# Altium PCB PCB1.PcbDoc
Units mil, origin at the board's own origin, x right, y up, seen from the top; angles counter-clockwise.
Board outline 900 x 4570 mil, 2 copper layers (Top Layer, Bottom Layer); 27 components, 20 nets, 79 pads, 8 vias.
Unrouted connection lines stored in the file: 1.
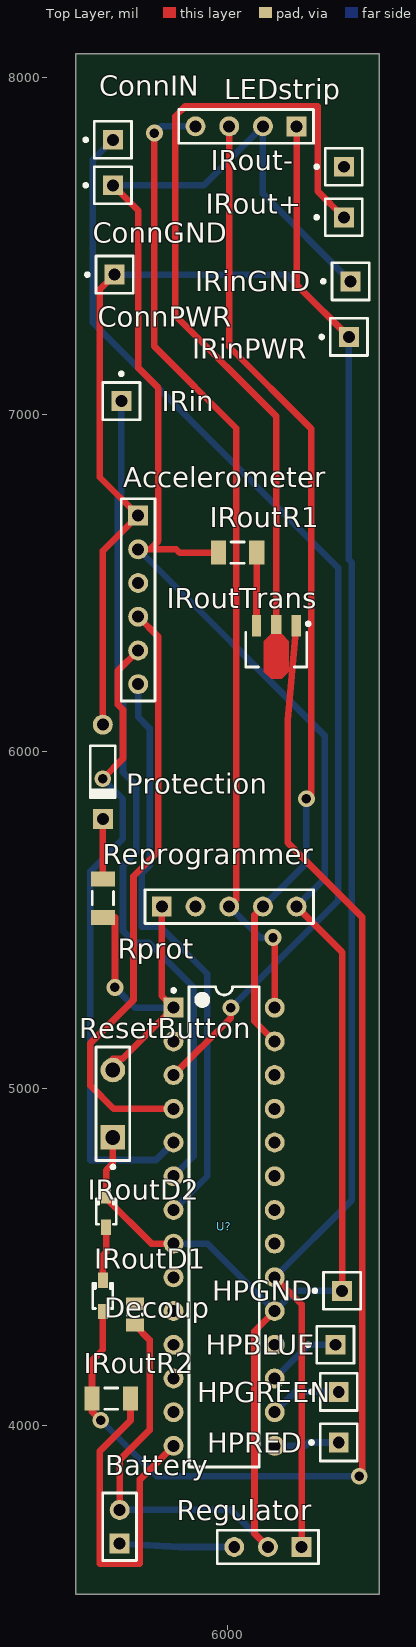
[diagram p0: Top Layer view]
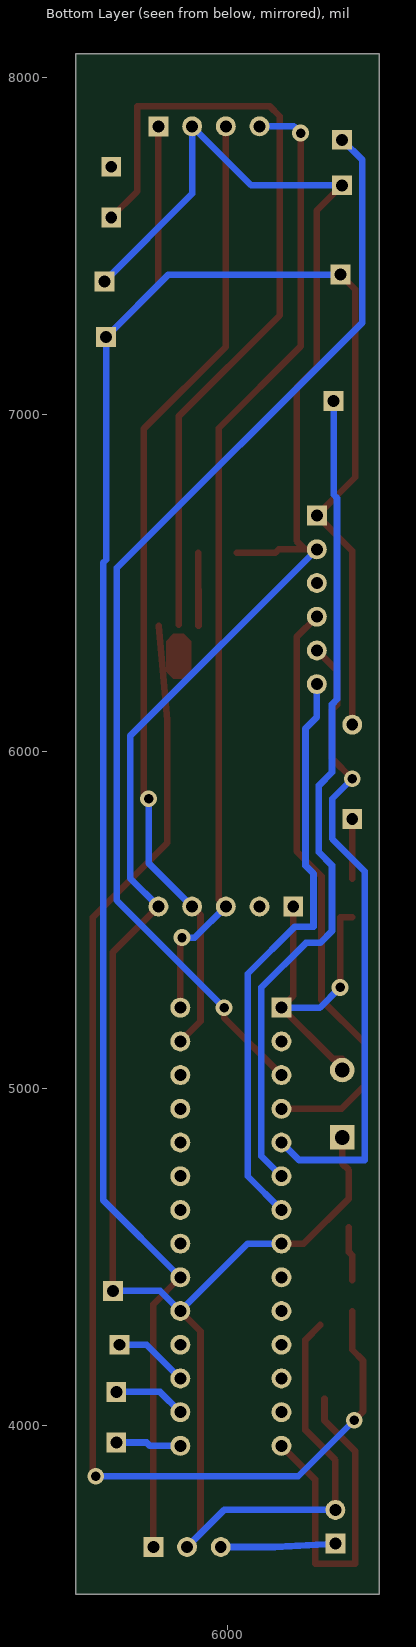
[diagram p1: Bottom Layer view, seen from below]

## Layer stack, top to bottom
Top Solder: solder mask 0.4, Solder Resist, Dk 3.5
Top Layer: signal copper 1.4
Dielectric 1: dielectric 12.6, FR-4, Dk 4.8
Bottom Layer: signal copper 1.4
Bottom Solder: solder mask 0.4, Solder Resist, Dk 3.5

## Board outline
5550,3500 6450,3500 6450,8070 5550,8070

## Design rules (kind name [scope] priority, off if disabled: settings)
Clearance [All] p1: gap=20
PolygonConnect [All] p1: connectstyle=Relief reliefconductorwidth=10 reliefentries=4 polygonreliefangle="90 Angle" airgapwidth=10
RoomDefinition Schematic [InComponentClass('Schematic')] p1: confinementstyle=ConfineIn formatcopy=TRUE lockcomponents=FALSE outline 4475,935 17370,935 17370,1785 4475,1785
RoutingVias [All] p1: holewidth=28 width=50 viastyle="Through Hole" minholewidth=28 minwidth=50 maxholewidth=28 maxwidth=50
SolderMaskExpansion [All] p1: expansion=4
Width [All] p1: maxlimit=19.68 minlimit=19.68 preferedwidth=19.68 minimp=50.000000 maximp=50.000000 favimp=50.000000
30 further rules are at their usual default settings.

## Components (designator, comment, footprint, x,y, rotation, side; value= is the part's Value field where it differs from the comment)
Accelerometer "Header 6" HDR1X6 5735,6700 r270 top
Battery "Header 2" HDR1X2 5680,3650 r90 top
ConnGND "Plug" PIN1 5660,7680 r90 top
ConnIN "Plug" PIN1 5660,7815 r90 top
ConnPWR "Plug" PIN1 5665,7415 r90 top
Decoup "10uf" CAPC0805(2012)75_L 5725,4330 r90 top (schematic designator DecouplingCap)
HPBLUE "Plug" PIN1 6320,4240 r90 top
HPGND "Plug" PIN1 6340,4400 r90 top
HPGREEN "Plug" PIN1 6330,4100 r90 top
HPRED "Plug" PIN1 6330,3950 r90 top
IRin "Plug" PIN1 5685,7040 r0 top
IRinGND "Plug" PIN1 6365,7395 r90 top
IRinPWR "Plug" PIN1 6360,7230 r90 top
IRout+ "Plug" PIN1 6345,7585 r90 top
IRout- "Plug" PIN1 6345,7735 r90 top
IRoutD1 "ZHCS400" DIOD-SOD323-2_V 5630,4385 r90 top
IRoutD2 "ZHCS400" DIOD-SOD323-2_V 5640,4635 r90 top
IRoutR1 "1K 5% 1206(3216)" RESC1206(3216)_N 6030,6590 r0 top
IRoutR2 "7.2K 5% 1206(3216)" RESC1206(3216)_N 5655,4080 r0 top
IRoutTrans "BFN18" INF-SOT89_SC-62_M 6145,6310 r270 top
LEDstrip "Header 4" HDR1X4 6205,7855 r180 top
Protection "Diode 1N4148" DO-35 5630,5940 r270 top
Regulator "Header 3" HDR1X3 6220,3640 r180 top
Reprogrammer "Header 5" HDR1X5 5805,5540 r0 top
ResetButton "SW-SPST" SPST-2 5660,4955 r90 top
Rprot "1K 5% 1206(3216)" RESC1206(3216)_N 5630,5565 r90 top
U? "PIC16F72-I/SP" SPDIP300-SP28 5990,4590 r0 top

## Footprints (in the part's own frame and the unit in brackets; to place one, negate y for a bottom-side part, rotate by r counter-clockwise, add the part's x,y. Pads: shape width x height; smd on the part's side, far side on the other; paste and mask are expansions set on the pad)
CAPC0805(2012)75_L [mm] "Chip Capacitor, Body 2.0x1.2mm, Height 0.75mm, IPC High Density"
  rect 0.95x1.35 smd: 1(-0.8,0) 2(0.8,0)
  silkscreen extent -0.05,-0.58 0.05,0.58, body extent -1.1,-0.72 1.1,0.72, height 0.75
DIOD-SOD323-2_V [mil] "SMT Diode, 2 Leads, Body 1.7 x 1.3 mm"
  rect 45x30 smd: 1(-46.26,0) 2(46.26,0)
  silkscreen extent -37,-30 37,30, body extent -39,-27 38,28, height 43
DO-35 [mm] "Diode, Axial; Body 3.8 x 1.9 mm (LxDia. max), Lead Dia. 0.53 mm (max)"
  round 1.5 hole 0.9: 1(-3.55,0)
  rect 1.5x1.5 hole 0.9: 2(3.55,0)
  silkscreen extent -1.95,-0.95 2.05,0.95
HDR1X2 [mm] "Connector; Header; 2 Position"
  rect 1.5x1.5 hole 0.9: 1(0,0)
  round 1.5 hole 0.9: 2(2.54,0)
  silkscreen extent -1.27,-1.27 3.81,1.27
HDR1X3 [mm] "Connector; Header; 3 Position"
  rect 1.5x1.5 hole 0.9: 1(0,0)
  round 1.5 hole 0.9: 2(2.54,0) 3(5.08,0)
  silkscreen extent -1.27,-1.27 6.35,1.27
HDR1X4 [mm] "Connector; Header; 4 Position"
  rect 1.5x1.5 hole 0.9: 1(0,0)
  round 1.5 hole 0.9: 2(2.54,0) 3(5.08,0) 4(7.62,0)
  silkscreen extent -1.27,-1.27 8.89,1.27
HDR1X5 [mm] "Connector; Header; 5 Position"
  rect 1.5x1.5 hole 0.9: 1(0,0)
  round 1.5 hole 0.9: 2(2.54,0) 3(5.08,0) 4(7.62,0) 5(10.16,0)
  silkscreen extent -1.27,-1.27 11.43,1.27
HDR1X6 [mm] "Connector; Header; 6 Position"
  rect 1.5x1.5 hole 0.9: 1(0,0)
  round 1.5 hole 0.9: 2(2.54,0) 3(5.08,0) 4(7.62,0) 5(10.16,0) 6(12.7,0)
  silkscreen extent -1.27,-1.27 13.97,1.27
INF-SOT89_SC-62_M [mm] "SOT89, 3-Leads, Body 4.5x2.5mm, Pitch 1.5mm, IPC Low Density"
  rect 1.6x0.7 smd: 1(-1.6,1.5) 3(-1.6,-1.5)
  rect 1.4x0.8 smd: 2(-1.7,0)
  Top Layer region: -1,0.4 -0.45,0.95 1.85,0.95 2.4,0.4 2.4,-0.4 1.85,-0.95 -0.45,-0.95 -1,-0.4
  silkscreen extent -1.87,-2.3 1.5,2.53, body extent -1.1,-2.3 1.5,2.3, height 1.6
PIN1 [mm] "Connector; Plug"
  rect 1.5x1.5 hole 0.9: 1(0,0)
  silkscreen extent -1.4,-1.4 1.4,2.17
RESC1206(3216)_N [mm] "Chip Resistor, Body 3.2x1.6mm, IPC Medium Density"
  rect 1.15x1.8 smd: 1(-1.45,0) 2(1.45,0)
  silkscreen extent -0.5,-0.8 0.5,0.8, body extent -1.67,-0.87 1.67,0.87, height 0.75
SPDIP300-SP28 [mm] "DIP, 28-Leads, Row Spacing 7.62mm, Pitch 2.54mm, Body 34.9x6.8mm"
  rect 1.5x1.5 hole 0.9: 1(-3.81,16.51)
  round 1.5 hole 0.9: 2(-3.81,13.97) 3(-3.81,11.43) 4(-3.81,8.89) 5(-3.81,6.35) 6(-3.81,3.81) 7(-3.81,1.27) 8(-3.81,-1.27) 9(-3.81,-3.81) 10(-3.81,-6.35) 11(-3.81,-8.89) 12(-3.81,-11.43) 13(-3.81,-13.97) 14(-3.81,-16.51) 15(3.81,-16.51) 16(3.81,-13.97) 17(3.81,-11.43) 18(3.81,-8.89) 19(3.81,-6.35) 20(3.81,-3.81) 21(3.81,-1.27) 22(3.81,1.27) 23(3.81,3.81) 24(3.81,6.35) 25(3.81,8.89) 26(3.81,11.43) 27(3.81,13.97) 28(3.81,16.51)
  silkscreen extent -3.93,-18.1 2.65,18.1, body extent -3.55,-18.1 3.55,18.1, height 5.08
SPST-2 [mm] "Switch; 2 Leads"
  rect 1.85x1.85 hole 1.1: 1(-2.54,0)
  round 1.85 hole 1.1: 2(2.54,0)
  silkscreen extent -4.89,-1.27 4.28,1.27

## Part data
Accelerometer: "Header, 6-Pin"
Battery: "Header, 2-Pin"
Decoup: library part CMP-1036-01219-1, "CAP 22pF 16V ±5% 0805 (2012 Metric) Thickness 0.75mm SMD"
IRoutD1 IRoutD2: library part CMP-0303-00001-1, "Schottky Diode, 400mA"
IRoutR1 IRoutR2 Rprot: library part CMP-1014-00074-1, "1K 0.25W 5% 1206 (3216 Metric)  SMD"
IRoutTrans: library part CMP-1197-00012-1, "NPN Silicon High-Voltage Transistor, 300 V VCEO, 30 mA IC, SOT89, Reel, Green"
LEDstrip: "Header, 4-Pin"
Protection: "High Conductance Fast Diode"
Regulator: "Header, 3-Pin"
Reprogrammer: "Header, 5-Pin"
ResetButton: "Single-Pole, Single-Throw Switch"
U?: "8-Bit CMOS FLASH Microcontroller with A/D Converter, 2K (x14-Bit words) FLASH, 128 Bytes RAM, 28-Pin PDIP 300mil, Standard VDD Range, Industrial Temperature"

## Via types
v1: diameter 50, hole 28, Top Layer to Bottom Layer, 8 vias

## Nets (pads, with @x,y where several pads share a name; then routed paths per layer and width w, separated by ;. In a path a pad name is that pad's centre, name@x,y a point inside that pad or via, vN(x,y) a via of type N, cw(c..) or ccw(c..) an arc to the next point about the centre after c; other vN are vias at no path point)
NetAccelerometer_1: Accelerometer.1 ConnPWR.1 IRinPWR.1 LEDstrip.1 Protection.1 Regulator.1 U?.20 | length 6626.7
  Top Layer w19.68: Protection.1 5630,6595 Accelerometer.1 5621,6814 5621,7371 ConnPWR.1 ; U?.20 6220,4360 Regulator.1 ; LEDstrip.1 6205,7385 IRinPWR.1
  Bottom Layer w19.68: ConnPWR.1 6175,7415 IRinPWR.1 6360,6569 6369,6560 6369,4669 U?.20
NetAccelerometer_2: Accelerometer.2 Battery.2 ConnGND.1 Decoup.1 HPGND.1 IRinGND.1 IRoutD2.2 IRoutR1.1 LEDstrip.2 Regulator.2 Reprogrammer.5 ResetButton.1 U?.8 U?.19 | length 7876.6
  Top Layer w19.68: ResetButton.1 5660,4778 5640,4758 IRoutD2.2 5640,4674 5774,4540 U?.8 ; ConnGND.1 5735.57,7604.43 5735.57,7137.72 5795,7078.28 5795,6625 5770,6600 ; Battery.2 5680,3897.64 5769,3986.64 5769,4254.5 Decoup.1 ; Accelerometer.2 5770,6600 ; IRoutR1.1 5858,6590 5848,6600 5770,6600 ; Regulator.2 6080,3680 6080,4280 U?.19 ; Reprogrammer.5 6340,5405 HPGND.1
  Bottom Layer w19.68: ConnGND.1 5930,7680 LEDstrip.2 6105,7655 IRinGND.1 ; Battery.2 6010,3750 Regulator.2 ; Accelerometer.2 6288.84,6046.16 6288.84,5623.84 Reprogrammer.5 ; U?.8 5940,4540 U?.19 6200,4400 HPGND.1
NetAccelerometer_4: Accelerometer.4 U?.4 | length 1775.1
  Top Layer w19.68: Accelerometer.4 5795,6340 5795,5704 5721,5630 5721,5263 5593,5135 5593,5009 5662,4940 U?.4
NetAccelerometer_5: Accelerometer.5 U?.5 | length 1901
  Top Layer w19.68: v1(5630,5919.37) 5690,5979.37 5690,6124 5675,6139 5675,6240 Accelerometer.5
  Bottom Layer w19.68: v1(5630,5919.37) 5689.37,5860 5689.37,5740.87 5593,5644.5 5593,4788 5788,4788 U?.5
NetAccelerometer_6: Accelerometer.6 U?.7 | length 1738.2
  Bottom Layer w19.68: Accelerometer.6 5735,6102 5768.74,6068.26 5768.74,5661.49 5745,5637.75 5745,5480.63 5800,5480.63 5940,5340.63 5940,4740 U?.7
NetBattery_1: Battery.1 Regulator.3 | length 340.3
  Bottom Layer w19.68: Battery.1 5860,3640 Regulator.3
NetConnIN_1: ConnIN.1 U?.3 | length 3304
  Top Layer w19.68: U?.3 6010,5210 v1(6010,5240)
  Bottom Layer w19.68: ConnIN.1 5600,7755 5600,7273 6328.53,6544.47 6328.53,5558.53 v1(6010,5240)
NetHPBLUE_1: HPBLUE.1 U?.17 | length 221.4
  Bottom Layer w19.68: U?.17 6240,4240 HPBLUE.1
NetHPGREEN_1: HPGREEN.1 U?.16 | length 214.9
  Bottom Layer w19.68: U?.16 6200,4100 HPGREEN.1
NetHPRED_1: HPRED.1 U?.15 | length 194.1
  Bottom Layer w19.68: U?.15 6230,3940 6240,3950 HPRED.1
NetIRin_1: IRin.1 U?.6 | length 2479.5
  Bottom Layer w19.68: IRin.1 5685,6762 5675,6752 5675,6155 5690,6140 5690,5938.35 5729.06,5899.29 5729.06,5701.18 5690,5662.12 5690,5467.43 5725,5432.43 5767.57,5432.43 5900,5300 5900,4800 U?.6
NetIRout+_1: IRout+.1 IRoutTrans.2 | length 2429.7
  Top Layer w19.68: IRoutTrans.2 6145,6994 5845,7294 5845,7885 5875,7915 6268,7915 6268,7662 IRout+.1
NetIRoutD1_1: IRoutD1.1 IRoutR2.1 IRoutTrans.1 | length 3802
  Top Layer w19.68: v1(5623.91,4016) 5597.91,4042 IRoutR2.1 5597.91,4193 5630,4225.09 IRoutD1.1 ; IRoutTrans.1 6179,6094 6179,5729 6400,5508 6400,3859 v1(6391,3850)
  Bottom Layer w19.68: v1(5623.91,4016) 5789.91,3850 v1(6391,3850)
NetIRoutD1_2: IRoutD1.2 IRoutD2.1 | length 161.6
  Top Layer w19.68: IRoutD1.2 5630,4505 5640,4515 IRoutD2.1
NetIRoutR1_2: IRoutR1.2 IRoutTrans.3 | length 217.5
  Top Layer w19.68: IRoutTrans.3 6085.94,6480 6087.09,6481.14 IRoutR1.2
NetIRoutR2_2: IRoutR2.2 U?.14 | length 1038.7
  Top Layer w19.68: IRoutR2.2 5712.09,4015.09 5620.63,3923.63 5620.63,3590 5740,3590 5740,3840 U?.14
NetLEDstrip_3: LEDstrip.3 Reprogrammer.4 U?.27 | length 2910.1
  Top Layer w19.68: LEDstrip.3 6005,7201 6248,6958 6248,5873.84 v1(6234,5859.84) ; Reprogrammer.4 6080,5515 6080,5200 U?.27
  Bottom Layer w19.68: Reprogrammer.4 6234,5669 v1(6234,5859.84)
NetLEDstrip_4: LEDstrip.4 Reprogrammer.3 U?.28 | length 2912.8
  Top Layer w19.68: v1(5783,7835) 5783,7202 6026,6959 6026,5561 Reprogrammer.3 ; v1(6135,5448) 6140,5443 U?.28
  Bottom Layer w19.68: v1(5783,7835) 5803,7855 LEDstrip.4 ; Reprogrammer.3 6097,5448 v1(6135,5448)
NetProtection_2: Protection.2 Rprot.2 | length 178.1
  Top Layer w19.68: Rprot.2 Protection.2
NetReprogrammer_1: Reprogrammer.1 ResetButton.2 Rprot.1 U?.1 | length 1033.8
  Top Layer w19.68: Rprot.1 5666,5507.91 v1(5666,5300) ; ResetButton.2 5660,5089 5689,5089 U?.1 5805,5275 Reprogrammer.1
  Bottom Layer w19.68: v1(5666,5300) 5726,5240 U?.1
pads on no net: Accelerometer.3 Decoup.2 IRout-.1 Reprogrammer.2 U?.2 U?.9 U?.10 U?.11 U?.12 U?.13 U?.18 U?.21 U?.22 U?.23 U?.24 U?.25 U?.26